# Altium PCB PCB1.PcbDoc
Units mm, origin at the board's own origin, x right, y up, seen from the top; angles counter-clockwise.
Board outline 190.25 x 150.01 mm, 2 copper layers (Top Layer, Bottom Layer); 72 components, 61 nets, 276 pads, 14 vias.
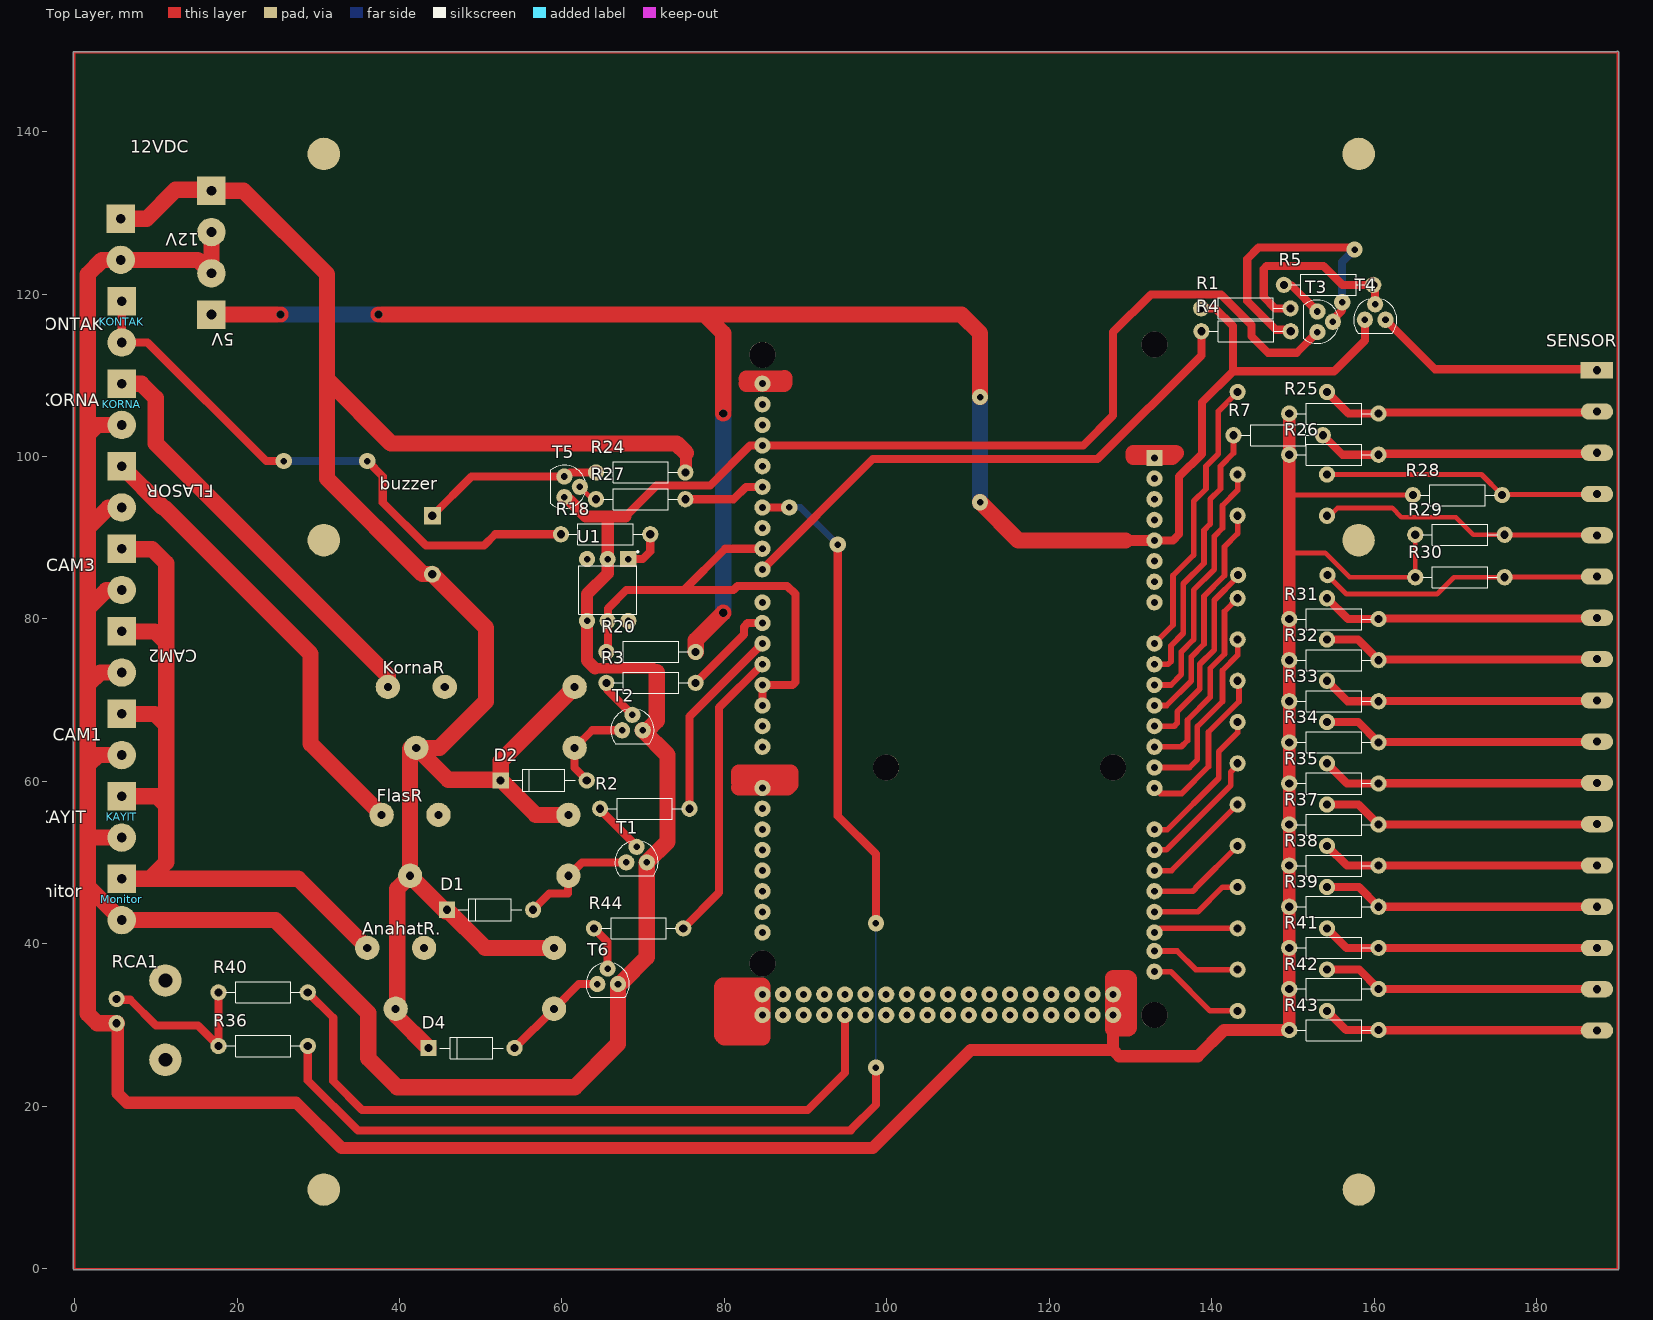
[diagram p0: Top Layer view]
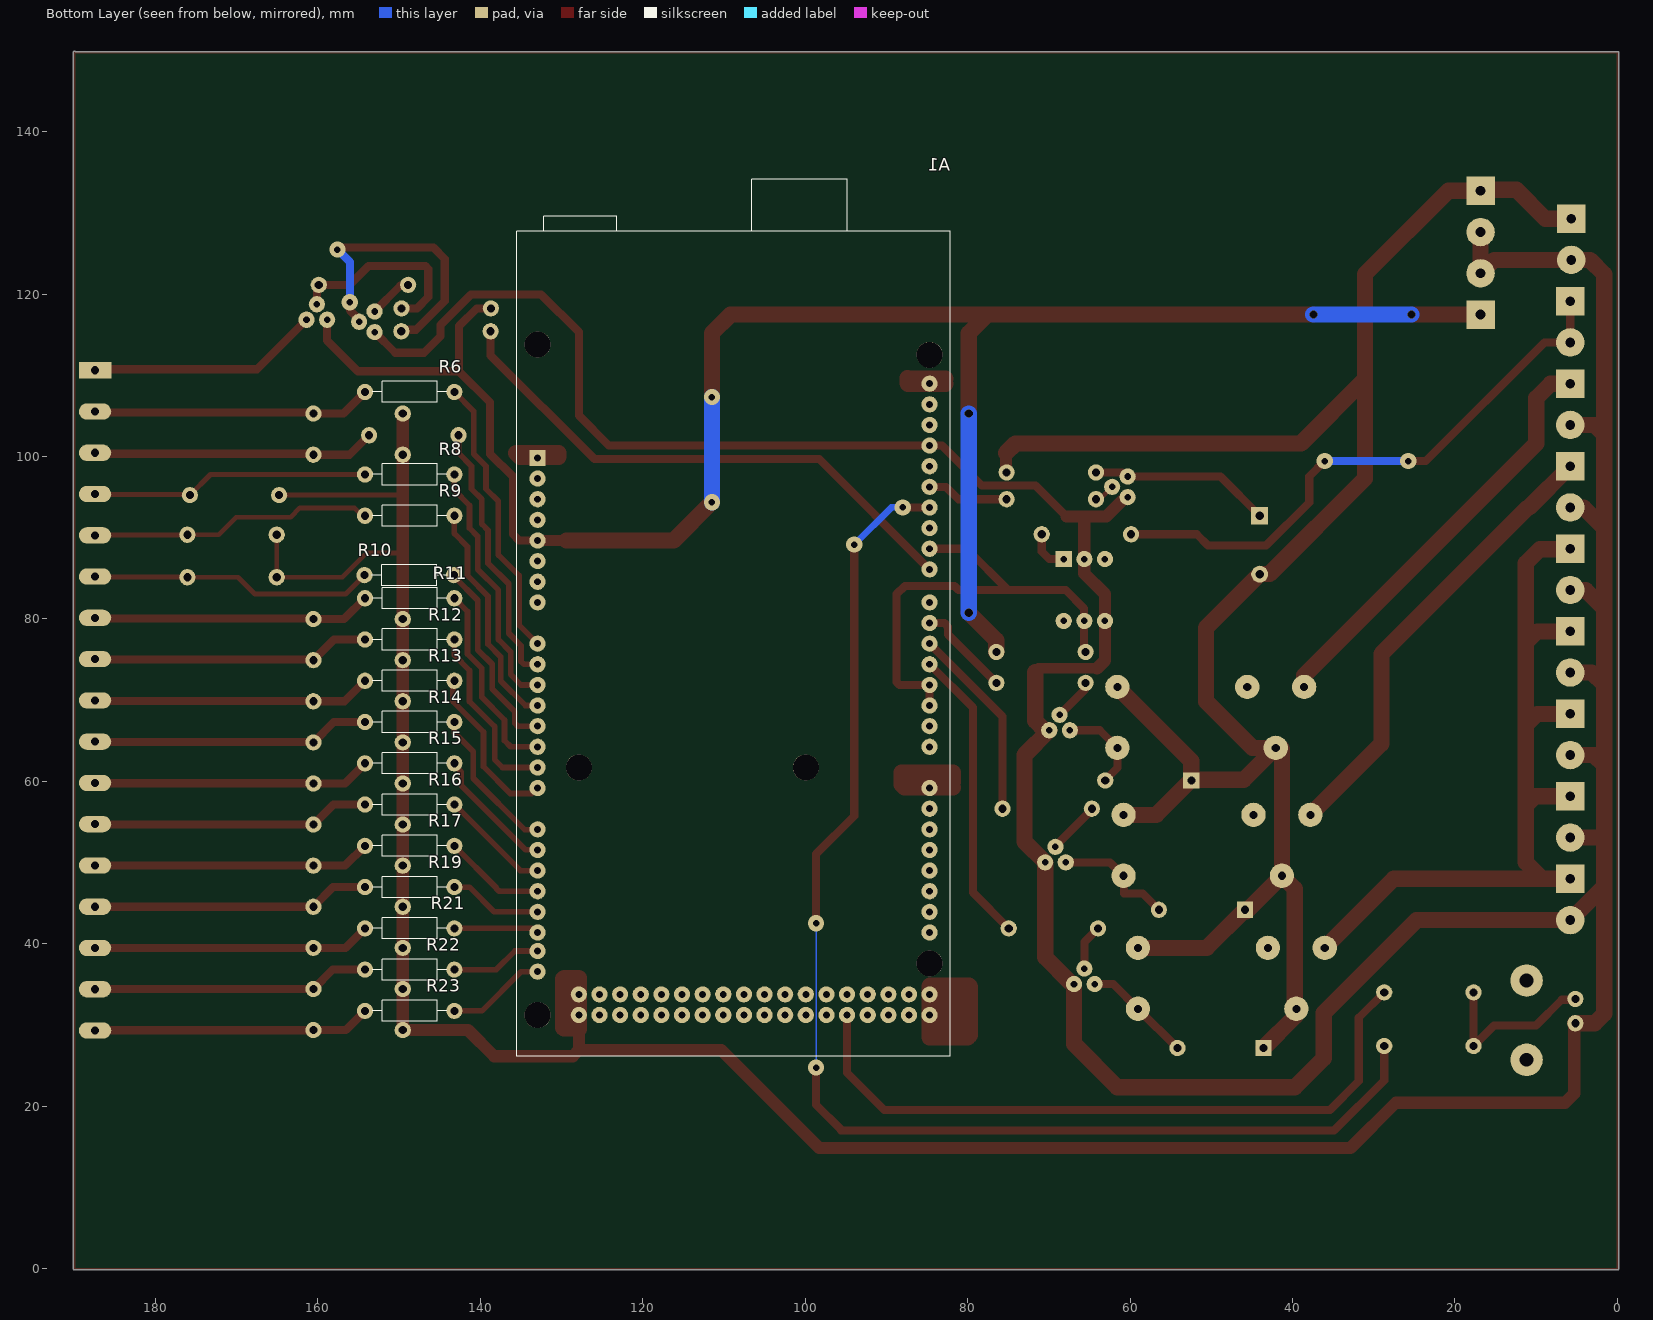
[diagram p1: Bottom Layer view, seen from below]

## Layer stack, top to bottom
Top Solder: solder mask 0.0102, Solder Resist, Dk 3.5
Top Layer: signal copper 0.0356
Dielectric 1: dielectric 0.32, FR-4, Dk 4.8
Bottom Layer: signal copper 0.0356
Bottom Solder: solder mask 0.0102, Solder Resist, Dk 3.5

## Board outline
-0.154,0 ccw(c-0.027,0) -0.027,-0.127 189.973,-0.127 ccw(c189.973,0) 190.1,0 ccw(c189.973,0) 190.092,0.044 190.092,149.758 ccw(c189.965,149.758) 189.882,149.855 ccw(c189.846,149.733) 189.846,149.86 -0.027,149.86 ccw(c-0.027,149.733) -0.154,149.733

## Design rules (kind name [scope] priority, off if disabled: settings)
Clearance [All] p1: gap=0.1 ignorepadtopadclearanceinfootprint=FALSE except(0: Arc-Hole Track-Hole SMDPad-Hole THPad-Hole Via-Hole Fill-Hole Poly-Hole Region-Hole Text-Hole)
HoleSize [All] p1: absolutevalues=TRUE maxlimit=15 minlimit=0.005 maxpercent=80.000 minpercent=20.000
PolygonConnect [All] p1: connectstyle=Relief reliefconductorwidth=0.254 reliefentries=4 polygonreliefangle="90 Angle" airgapwidth=0.254
RoutingVias [All] p1: holewidth=10 width=10 viastyle="Through Hole" minholewidth=0.1 minwidth=0.1 maxholewidth=10 maxwidth=10
SolderMaskExpansion [All] p1: expansion=0.102 istentingtop=FALSE
Width [All] p1 off: maxlimit=10 minlimit=0.1 preferedwidth=0.254 minimp=50.000000 maximp=50.000000 favimp=50.000000
29 further rules are at their usual default settings.

## Components (designator, comment, footprint, x,y, rotation, side; value= is the part's Value field where it differs from the comment)
5V "2x5,08" 2X5,08 16.854,120.01 r90 top
12V "2x5,08" 2X5,08 5.688,126.746 r270 top
12VDC "2x5,08" 2X5,08 16.854,130.17 r270 top
A1 "arduino mega" ARDUINO_A000067 108.812,76.962 r180 bottom
AnahatR. "Röle" RöLE 59.028,39.504 r180 top
buzzer "Buzzer" BUZZER 44.042,92.71 r270 top
CAM1 "2x5,08" 2X5,08 5.815,65.786 r270 top
CAM2 "2x5,08" 2X5,08 5.815,75.946 r270 top
CAM3 "2x5,08" 2X5,08 5.815,86.106 r270 top
D1 "1N4007" 1N4007 51.154,44.196 r0 top
D2 "1N4007" 1N4007 57.758,60.122 r0 top
D4 "1N4007" 1N4007 48.868,27.178 r0 top
FLASOR "2x5,08" 2X5,08 5.815,96.266 r270 top
FlasR "Röle" RöLE 60.804,55.88 r180 top
KAYIT "2x5,08" 2X5,08 5.815,55.626 r270 top
KONTAK "2x5,08" 2X5,08 5.815,116.586 r270 top
KORNA "2x5,08" 2X5,08 5.815,106.426 r270 top
KornaR "Röle" RöLE 61.568,71.628 r180 top
Monitor "2x5,08" 2X5,08 5.815,45.466 r270 top (schematic designator MONİTÖR)
R1 "10K" RES 144.194,118.237 r180 top
R2 "1K" RES 70.204,56.642 r180 top
R3 "1K" RES 70.966,72.136 r180 top
R4 "1k" RES 144.22,115.418 r0 top
R5 "1K" RES 154.38,121.133 r180 top
R6 "RES" RES 148.69,107.95 r0 bottom
R7 "RES" RES 148.182,102.616 r0 top
R8 "RES" RES 148.69,97.79 r0 bottom
R9 "RES" RES 148.69,92.71 r0 bottom
R10 "RES" RES 148.754,85.391 r0 bottom
R11 "RES" RES 148.69,82.55 r0 bottom
R12 "RES" RES 148.69,77.47 r0 bottom
R13 "RES" RES 148.69,72.39 r0 bottom
R14 "RES" RES 148.69,67.31 r0 bottom
R15 "RES" RES 148.69,62.23 r0 bottom
R16 "RES" RES 148.69,57.15 r0 bottom
R17 "RES" RES 148.69,52.07 r0 bottom
R18 "1k" RES 65.378,90.424 r0 top
R19 "RES" RES 148.69,46.99 r0 bottom
R20 "10k" RES 70.966,75.946 r0 top
R21 "RES" RES 148.69,41.91 r0 bottom
R22 "RES" RES 148.69,36.83 r0 bottom
R23 "RES" RES 148.69,31.75 r0 bottom
R24 "1k" RES 69.696,98.044 r0 top
R25 "1k" RES 155.04,105.283 r0 top
R26 "RES" RES 155.04,100.223 r0 top
R27 "1k" RES 69.696,94.742 r180 top
R28 "1k" RES 170.256,95.246 r0 top
R29 "1k" RES 170.561,90.37 r0 top
R30 "1k" RES 170.561,85.137 r0 top
R31 "RES" RES 155.04,79.985 r0 top
R32 "1k" RES 155.04,74.925 r0 top
R33 "1k" RES 155.04,69.865 r0 top
R34 "1k" RES 155.04,64.806 r0 top
R35 "1k" RES 155.04,59.746 r0 top
R36 "470" RES 23.214,27.432 r0 top
R37 "1k" RES 155.04,54.686 r0 top
R38 "1k" RES 155.04,49.627 r0 top
R39 "1k" RES 155.04,44.567 r0 top
R40 "1K" RES 23.214,34.036 r0 top
R41 "1k" RES 155.04,39.507 r0 top
R42 "1k" RES 155.04,34.447 r0 top
R43 "1k" RES 155.04,29.388 r0 top
R44 "1K" RES 69.442,41.91 r180 top
RCA1 "RCA YÜZEY" RCA 5.18,30.226 r270 top
SENSOR "17PİN" 17X5,08 187.425,110.617 r270 top
T1 "BC337" BC337-TO92 69.188,50.038 r0 top
T2 "BC337" BC337-TO92 68.68,66.294 r0 top
T3 "BC337" BC337-TO92 153.008,116.586 r270 top
T4 "BC327" BC337-TO92 160.12,116.84 r0 top
T5 "BC337" BC337-TO92 60.298,96.266 r270 top
T6 "BC337" BC337-TO92 65.632,35.052 r0 top
U1 "4N25" 4N25 65.632,83.566 r270 top

## Footprints (in the part's own frame and the unit in brackets; to place one, negate y for a bottom-side part, rotate by r counter-clockwise, add the part's x,y. Pads: shape width x height; smd on the part's side, far side on the other; paste and mask are expansions set on the pad)
1N4007 [mm]
  round 2 hole 1: A(5.3,0)
  rect 2x2 hole 1: C(-5.3,0)
  silkscreen extent -3.9,-1.35 3.9,1.35
2X5,08 [mm]
  rect 3.5x3.5 hole 1.2: 1(-2.54,0)
  round 3.5 hole 1.2: 2(2.54,0)
4N25 [mm]
  rect 2x2 hole 0.8: 1(-3.81,2.54)
  round 2 hole 0.8: 2(-3.81,0) 3(-3.81,-2.54) 4(3.81,-2.54) 5(3.81,0) 6(3.81,2.54)
  silkscreen extent -4.8,-3.56 3,3.8
17X5,08 [mm]
  rect 2x4 hole 1: 1(0,0)
  oval 2x4 hole 1: 2(5.08,0) 3(10.16,0) 4(15.24,0) 5(20.32,0) 6(25.4,0) 7(30.48,0) 8(35.56,0) 9(40.64,0) 10(45.72,0) 11(50.8,0) 12(55.88,0) 13(60.96,0) 14(66.04,0) 15(71.12,0) 16(76.2,0) 17(81.28,0)
ARDUINO_A000067 [mm]
  round 2 hole 0.85: 0(24.13,-12.7) 1(24.13,-10.16) 2(24.13,-7.62) 3(24.13,-5.08) 3V3(-24.13,15.24) 4(24.13,-2.54) 5(24.13,0) 5V_1(-24.13,12.7) 5V_2(24.13,-43.18) 5V_3(24.13,-45.72) 6(24.13,2.54) 7(24.13,5.08) 8(24.13,9.144) 9(24.13,11.684) 10(24.13,14.224) 11(24.13,16.764) 12(24.13,19.304) 13(24.13,21.844) 14(24.13,-17.78) 15(24.13,-20.32) 16(24.13,-22.86) 17(24.13,-25.4) 18(24.13,-27.94) 19(24.13,-30.48) 20(24.13,-33.02) 21(24.13,-35.56) 22(21.59,-43.18) 23(21.59,-45.72) 24(19.05,-43.18) 25(19.05,-45.72) 26(16.51,-43.18) 27(16.51,-45.72) 28(13.97,-43.18) 29(13.97,-45.72) 30(11.43,-43.18) 31(11.43,-45.72) 32(8.89,-43.18) 33(8.89,-45.72) 34(6.35,-43.18) 35(6.35,-45.72) 36(3.81,-43.18) 37(3.81,-45.72) 38(1.27,-43.18) 39(1.27,-45.72) 40(-1.27,-43.18) 41(-1.27,-45.72) 42(-3.81,-43.18) 43(-3.81,-45.72) 44(-6.35,-43.18) 45(-6.35,-45.72) 46(-8.89,-43.18) 47(-8.89,-45.72) 48(-11.43,-43.18) 49(-11.43,-45.72) 50(-13.97,-43.18) 51(-13.97,-45.72) 52(-16.51,-43.18) 53(-16.51,-45.72) AD0(-24.13,0) AD1(-24.13,-2.54) AD2(-24.13,-5.08) AD3(-24.13,-7.62) AD4(-24.13,-10.16) AD5(-24.13,-12.7) AD6(-24.13,-15.24) AD7(-24.13,-17.78) AD8(-24.13,-22.86) AD9(-24.13,-25.4) AD10(-24.13,-27.94) AD11(-24.13,-30.48) AD12(-24.13,-33.02) AD13(-24.13,-35.56) AD14(-24.13,-37.846) AD15(-24.13,-40.386) AREF(24.13,26.924) GND1(-24.13,10.16) GND2(-24.13,7.62) GND3(24.13,24.384) GND4(-19.05,-43.18) GND5(-19.05,-45.72) IOREF(-24.13,20.32) RESET(-24.13,17.78) SCL(24.13,32.004) SDA(24.13,29.464) VIN(-24.13,5.08)
  rect 2x2 hole 0.85: NC(-24.13,22.86)
  round 3.2 hole 3.2 unplated: ""(-24.13,-45.72) ""(-24.13,36.83) ""(-19.05,-15.24) ""(8.89,-15.24) ""(24.13,-39.37) ""(24.13,35.56)
  silkscreen extent -26.67,-50.8 26.67,57.15
BC337-TO92 [mm]
  round 2 hole 0.813: 1(1.27,0) 2(0,1.905) 3(-1.27,0)
  silkscreen extent -2.67,-1.65 2.66,2.55
BUZZER [mm]
  rect 2.1x2.1 hole 1: 1(0,0)
  round 2.1 hole 1: 2(7.2,0)
RCA [mm]
  round 2 hole 1: 1(0,0) 2(-3,0)
  round 4 hole 1.7: ""(-5.262,6) ""(4.5,6)
RES [mm]
  round 2 hole 1: 1(-5.5,0) 2(5.5,0)
  silkscreen extent -4.58,-1.3 4.58,1.3
RöLE [mm]
  round 3 hole 1: 1(16,0) 2(19.5,7.5) 3(23,0) 4(0,0) 5(0,7.5)

## Part data
5V 12V 12VDC buzzer CAM1 CAM2 CAM3 FLASOR KAYIT KONTAK KORNA Monitor: "TERMINAL BLOCK,HEADER, 5.08 MM, 2WAY; Product Range:-; Gender:Header", Package=None, Availability=Unavailable, EU_RoHS_Compliance=Compliant, MF="TE Connectivity", MP=282814-2, Price=None, SnapEDA_Link=https://www.snapeda.com/parts/282814-2/TE%20Connectivity%20AMP%20Connectors/view-part/2381383/?ref=snap, TE_purchase_URL=https://www.te.com/usa-en/product-282814-2.html?te_bu=Cor&te_type=disp&te_campaign=seda_glo_cor-seda-global-disp-prtnr-fy19-seda-model-bom-cta_sma-317_1&elqCampaignId=32493
A1: "ATmega2560 Arduino Mega2560 AVRÂ® ATmega AVR MCU 8-Bit Embedded Evaluation Board", Package=None, Availability=Unavailable, MF=Arduino, MP=A000067, Price=None, SnapEDA_Link=https://www.snapeda.com/parts/A000067/Arduino/view-part/557398/?ref=snap
D1 D2 D4: "Diode Standard 1000V 1A Through Hole DO-204AL _DO-41_", Package="DO-41 Good-Ark", Availability=Unavailable, MF="ON Semiconductor", MP=1N4007, Price=None, SnapEDA_Link=https://www.snapeda.com/parts/1N4007/ON%20Semiconductor/view-part/2816213/?ref=snap
R1 R2 R3 R4 R5 R18 R20 R24 R25 R27 R28 R29 R30 R32 R33 R34 R35 R36 R37 R38 R39 R40 R41 R42 R43 R44: library part RES, "1.4 kOhms Â±1% 0.25W, 1/4W Through Hole Resistor Axial Metal Film", Package="Axial Yageo", Availability=Unavailable, MF=Yageo, MP=MFR-25FBF52-1K, Price=None, SnapEDA_Link=https://www.snapeda.com/parts/MFR-25FBF52-1K/Yageo/view-part/1970177/?ref=snap
R6 R7 R8 R9 R10 R11 R12 R13 R14 R15 R16 R17 R19 R21 R22 R23 R26 R31: "1.4 kOhms Â±1% 0.25W, 1/4W Through Hole Resistor Axial Metal Film", Package="Axial Yageo", Availability=Unavailable, MF=Yageo, MP=MFR-25FBF52-1K, Price=None, SnapEDA_Link=https://www.snapeda.com/parts/MFR-25FBF52-1K/Yageo/view-part/1970177/?ref=snap
T1 T2 T3 T5 T6: "Bipolar _BJT_ Transistor NPN 45V 800mA 100MHz 625mW Through Hole TO-92-3", Package="TO-92 ON Semiconductor", Digi-Key_Part_Number=BC33740TACT-ND, Digi-Key_Purchase_URL=https://www.digikey.com/product-detail/en/on-semiconductor/BC33740TA/BC33740TACT-ND/1532788?utm_source=snapeda&utm_medium=aggregator&utm_campaign=symbol, MF="ON Semiconductor", MP=BC337, SnapEDA_Link=https://www.snapeda.com/parts/BC337/ON%20Semiconductor/view-part/2772334/?ref=snap
T4: library part BC337, "Bipolar _BJT_ Transistor NPN 45V 800mA 100MHz 625mW Through Hole TO-92-3", Package="TO-92 ON Semiconductor", Digi-Key_Part_Number=BC33740TACT-ND, Digi-Key_Purchase_URL=https://www.digikey.com/product-detail/en/on-semiconductor/BC33740TA/BC33740TACT-ND/1532788?utm_source=snapeda&utm_medium=aggregator&utm_campaign=symbol, MF="ON Semiconductor", MP=BC337, SnapEDA_Link=https://www.snapeda.com/parts/BC337/ON%20Semiconductor/view-part/2772334/?ref=snap
U1: "Optoisolator Transistor with Base Output 5000Vrms 1 Channel 6-DIP", Package="DIP-6 Lite-On", Availability=Unavailable, MF="Vishay Semiconductor", MP=4N25, Price=None, SnapEDA_Link=https://www.snapeda.com/parts/4N25/Vishay%20Semiconductor%20Opto%20Division/view-part/641454/?ref=snap

## Free pads (board coordinates)
  round 4 smd: 1(30.688,9.754) 1(30.688,89.704) 1(30.688,137.254) 1(158.079,89.704) 1(158.088,137.254) 1(158.113,9.754)

## Via types
v1: diameter 2, hole 0.8, Top Layer to Bottom Layer, 10 vias
v2: diameter 1, hole 1, Top Layer to Bottom Layer, 4 vias

## Nets (pads, with @x,y where several pads share a name; then routed paths per layer and width w, separated by ;. In a path a pad name is that pad's centre, name@x,y a point inside that pad or via, vN(x,y) a via of type N, cw(c..) or ccw(c..) an arc to the next point about the centre after c; other vN are vias at no path point)
+5: 5V.1 A1.5V_1 R1.2 R20.2 T4.3 | length 240.6
  Top Layer w1: A1.5V_1 135.228,89.662 135.99,90.424 135.99,97.531 138.784,100.325 138.784,106.68 142.594,110.49 ; R1.2 140.435,118.237 142.594,116.078 142.594,110.49 ; T4.3 158.85,114.3 155.04,110.49 142.594,110.49
  Top Layer w1.4: 129.386,89.662 A1.5V_1
  Top Layer w2: 5V.1 v2(25.368,117.47) ; v2(37.438,117.475) 77.57,117.475 ; R20.2 76.466,77.382 v2(79.856,80.772) ; v2(79.856,105.283) 79.856,115.189 77.57,117.475 ; v1(111.479,94.361) 116.178,89.662 129.386,89.662 ; v1(111.479,107.315) 111.479,115.189 109.193,117.475 77.57,117.475
  Bottom Layer w2: v2(25.368,117.47) 37.433,117.47 v2(37.438,117.475) ; v2(79.856,80.772) v2(79.856,105.283) ; v1(111.479,94.361) v1(111.479,107.315)
+12: 12V.1 12VDC.1 AnahatR..2 AnahatR..4 buzzer.2 D1.C D2.C D4.C FlasR.2 FlasR.4 KornaR.2 KornaR.4 R24.2 | length 251.7
  Top Layer w1.5: R24.2@75.284,98.044 75.284,100.428
  Top Layer w2: 12V.1 8.871,129.286 12.427,132.842 16.722,132.842 12VDC.1 20.806,132.71 31.088,122.428 31.088,109.474 ; KornaR.2@41.304,64.008 FlasR.2 ; D4.C 39.667,31.079 39.667,31.865 AnahatR..2 39.724,32.2 39.724,46.8 FlasR.2 ; D1.C@45.671,44.013 FlasR.2 ; D1.C 50.546,39.504 AnahatR..4 ; FlasR.4 56.776,55.88 D2.C@52.458,60.198 ; KornaR.4 52.458,62.518 D2.C@52.458,60.198 ; 75.284,100.428 74.112,101.6 38.962,101.6 31.088,109.474 ; 31.088,109.474 31.088,97.28 42.839,85.529 44.023,85.529 50.646,78.906 50.646,69.85 44.924,64.128 KornaR.2 45.998,60.198 D2.C@52.458,60.198
GND: 5V.2 12V.2 12VDC.2 A1.GND3 A1.GND5 CAM1.2 CAM2.2 CAM3.2 FLASOR.2 KAYIT.2 KORNA.2 Monitor.2 R25.1 R26.1 R28.1 R29.1 R30.1 R31.1 R32.1 R33.1 R34.1 R35.1 R37.1 R38.1 R39.1 R41.1 R42.1 R43.1 RCA1.1 T1.1 T2.1 T3.1 T5.1 T6.1 U1.2 U1.4 | length 700.5
  Top Layer w0.6: 149.54,88.134 153.975,88.134 156.972,85.137 R30.1 R29.1 ; 149.54,95.164 149.623,95.246 R28.1
  Top Layer w0.8: T6.1 67.043,35.052 67.303,35.312 T6.1@67.416,35.312 ; T2.1 70.05,66.394 T2.1@70.621,66.394 ; 71.22,73.914 71.689,73.445
  Top Layer w1: 67.821,92.613 71.652,96.444 78.256,96.444 83.158,101.346 A1.GND3 124.179,101.346 127.862,105.029 127.862,115.316 132.503,119.957 141.128,119.957 144.88,116.205 144.88,114.808 146.912,112.776 150.468,112.776 T3.1
  Top Layer w1.3: 64.069,73.914 71.22,73.914
  Top Layer w1.5: RCA1.1@5.307,30.226 5.307,21.59 6.45,20.447 27.278,20.447 32.866,14.859 98.271,14.859 110.336,26.924 127.862,26.924 ; T5.1@60.912,94.636 62.935,92.613 65.632,92.613 ; 64.069,73.914 63.092,74.891 U1.4 63.092,83.058 65.632,85.598 U1.2 65.632,92.613 ; 67.821,92.613 65.632,92.613 ; A1.GND5 127.862,26.924 ; R25.1@149.452,105.371 R25.1 R26.1 149.54,95.164 149.54,88.134 R31.1 R32.1 R33.1 R34.1 R35.1 R37.1 R38.1 R39.1 R41.1 R42.1 R43.1 141.502,29.388 138.276,26.162 128.624,26.162 127.862,26.924
  Top Layer w2: RCA1.1 2.796,30.226 1.624,31.398 1.624,47.117 ; KAYIT.2 1.975,53.086 1.624,52.735 ; CAM1.2 2.894,63.246 1.624,61.976 ; CAM2.2 3.148,73.406 1.624,71.882 ; CAM3.2 5.796,83.547 3.891,83.547 1.624,81.28 ; KORNA.2 2.796,103.886 1.624,102.714 ; FLASOR.2@5.834,93.745 FLASOR.2 5.796,93.707 4.145,93.707 1.624,91.186 ; 12VDC.2 5V.2 16.827,122.55 15.171,124.206 12V.2 5.669,124.187 3.383,124.187 1.624,122.428 1.624,102.714 ; T6.1 66.902,27.686 61.568,22.352 39.724,22.352 36.168,25.908 36.168,31.496 24.738,42.926 Monitor.2 1.624,47.117 ; T6.1@67.416,35.312 70.458,38.354 T1.1 72.998,52.578 72.998,63.246 T2.1 ; T2.1@70.621,66.394 71.689,67.461 71.689,73.445 ; 1.624,47.117 1.624,52.735 ; 1.624,52.735 1.624,61.976 ; 1.624,61.976 1.624,71.882 ; 1.624,71.882 1.624,81.28 ; 1.624,81.28 1.624,91.186 ; 1.624,91.186 1.624,102.714
NetA1_2: A1.2 A1.3 A1.9 R20.1 U1.5 | length 59.4
  Top Layer w1: R20.1@65.72,75.946 65.676,75.99 65.676,79.712 U1.5 65.662,79.786 65.662,81.31 67.918,83.566 75.03,83.566 ; A1.2 A1.3 88.395,71.882 88.746,72.233 88.746,83.058 87.73,84.074 81.634,84.074 81.126,83.566 75.03,83.566 ; A1.9 80.11,88.646 75.03,83.566
NetA1_4: A1.4 R44.1 | length 36.5
  Top Layer w1: R44.1 79.348,46.316 79.348,69.088 A1.4
NetA1_5: A1.5 R2.1 | length 24
  Top Layer w1: R2.1 75.704,67.984 A1.5
NetA1_6: A1.6 R3.1 | length 11.8
  Top Layer w1: R3.1 82.396,78.066 82.396,79.033 82.865,79.502 A1.6
NetA1_8: A1.8 R4.1 | length 67.9
  Top Layer w1: A1.8 98.271,99.695 125.957,99.695 138.72,112.458 R4.1
NetA1_11: A1.11 R36.2 | length 160.2
  Top Layer w1: R36.2 28.714,23.202 34.898,17.018 95.604,17.018 95.604,17.145 98.652,20.193 v1(98.652,24.765) ; A1.11 v1(87.984,93.726) ; v1(93.953,89.154) 93.953,55.753 98.652,51.054 v1(98.652,42.545)
  Bottom Layer w0.2: v1(98.652,24.765) v1(98.652,42.545)
  Bottom Layer w0.8: v1(87.984,93.726) 89.381,93.726 v1(93.953,89.154)
NetA1_12: A1.12 R27.1 | length 10.3
  Top Layer w1: R27.1 81.126,94.742 82.65,96.266 A1.12 A1.12@84.537,96.121
NetA1_29: A1.29 R40.2 | length 85.7
  Top Layer w1: R40.2 31.85,30.9 31.85,23.114 35.406,19.558 90.27,19.558 94.842,24.13 A1.29
NetA1_AD0: A1.AD0 R6.1 | length 35.2
  Top Layer w0.7: A1.AD0 135.228,79.248 135.228,85.344 137.768,87.884 137.768,94.488 139.292,96.012 139.292,98.806 140.816,100.33 140.816,105.576 R6.1
NetA1_AD1: A1.AD1 R7.1 | length 33.2
  Top Layer w0.7: A1.AD1 134.623,74.422 134.974,74.773 134.974,76.708 136.498,78.232 136.498,84.328 139.038,86.868 139.038,90.932 139.8,91.694 139.8,94.742 141.07,96.012 141.07,98.806 142.682,100.418 R7.1
NetA1_AD2: A1.AD2 R8.1 | length 31.3
  Top Layer w0.7: A1.AD2 134.974,71.882 136.244,73.152 136.244,75.946 137.768,77.47 137.768,83.566 140.308,86.106 140.308,90.17 141.324,91.186 141.324,93.98 143.19,95.846 R8.1
NetA1_AD3: A1.AD3 R9.1 | length 28.5
  Top Layer w0.7: A1.AD3 134.446,69.342 137.49,72.386 137.49,75.358 139.038,76.906 139.038,82.804 141.578,85.344 141.578,88.9 143.19,90.512 R9.1
NetA1_AD4: A1.AD4 R10.1 | length 24.1
  Top Layer w0.7: A1.AD4 135.385,66.802 135.736,67.153 135.736,68.58 138.53,71.374 138.53,74.422 140.308,76.2 140.308,82.296 R10.1@143.19,85.178
NetA1_AD5: A1.AD5 R11.1 | length 24.5
  Top Layer w0.7: A1.AD5 136.244,64.262 137.006,65.024 137.006,67.564 139.8,70.358 139.8,73.914 141.578,75.692 141.578,80.938 R11.1
NetA1_AD6: A1.AD6 R12.1 | length 22.5
  Top Layer w0.7: A1.AD6 137.26,61.722 138.227,62.689 138.227,66.753 141.324,69.85 141.324,73.66 143.19,75.526 R12.1
NetA1_AD7: A1.AD7 R13.1 | length 20.5
  Top Layer w0.7: A1.AD7@132.95,59.174 133.02,59.174 133.672,58.522 136.3,58.522 139.598,61.82 139.598,66.092 143.356,69.85 143.356,71.8 143.305,71.851 143.305,72.275 R13.1
NetA1_AD8: A1.AD8 R14.1 | length 18.5
  Top Layer w0.7: A1.AD8 133.008,54.036 134.507,54.036 140.868,60.397 140.868,63.664 143.19,65.986 R14.1
NetA1_AD9: A1.AD9 R15.1 | length 15.8
  Top Layer w0.7: A1.AD9 132.965,51.585 134.418,51.585 142.342,59.509 142.342,61.17 143.19,62.018 R15.1
NetA1_AD10: A1.AD10 R16.1 | length 13.6
  Top Layer w0.7: A1.AD10 135.062,49.022 R16.1
NetA1_AD11: A1.AD11 R17.1 | length 12.6
  Top Layer w0.7: A1.AD11 137.671,46.482 138.022,46.833 138.022,46.902 R17.1
NetA1_AD12: A1.AD12 R19.1 | length 11.5
  Top Layer w0.7: A1.AD12 138.276,43.942 141.324,46.99 R19.1
NetA1_AD13: A1.AD13 R21.1 | length 10.5
  Top Layer w0.7: A1.AD13 133.147,41.402 133.655,41.91 R21.1
NetA1_AD14: A1.AD14 R22.1 | length 11.2
  Top Layer w0.7: A1.AD14 135.736,39.116 138.022,36.83 R22.1
NetA1_AD15: A1.AD15 R23.1 | length 12.2
  Top Layer w0.7: A1.AD15 134.974,36.576 139.8,31.75 R23.1
NetAnahatR._3: AnahatR..3 CAM1.1 CAM2.1 CAM3.1 KAYIT.1 Monitor.1 | length 97.7
  Top Layer w2: Monitor.1 9.244,48.006 ; KAYIT.1 10.104,58.166 11.276,56.994 ; CAM1.1 5.83,68.311 9.865,68.311 11.276,66.9 ; CAM2.1 5.83,78.471 9.865,78.471 11.276,77.06 ; CAM3.1 5.865,88.596 9.548,88.596 11.276,86.868 11.276,77.06 ; AnahatR..3 27.526,48.006 9.244,48.006 ; 9.244,48.006 11.276,50.038 11.276,56.994 ; 11.276,56.994 11.276,66.9 ; 11.276,66.9 11.276,77.06
NetAnahatR._5: AnahatR..5 D4.A T6.3 | length 13.5
  Top Layer w1: D4.A 54.185,27.178 59.011,32.004 AnahatR..5 62.076,35.052 T6.3
Netbuzzer_1: buzzer.1 R24.1 T5.3 | length 22.4
  Top Layer w1: buzzer.1 48.868,97.536 T5.3 60.493,97.536 61.001,98.044 R24.1
NetD1_A: D1.A FlasR.5 T1.3 | length 15.1
  Top Layer w1: D1.A 58.446,46.188 60.732,46.188 60.732,48.308 FlasR.5 62.462,50.038 T1.3
NetD2_A: D2.A KornaR.5 T2.3 | length 11.3
  Top Layer w1: D2.A@63.058,60.198 61.568,61.688 KornaR.5 63.734,66.294 T2.3
NetFLASOR_1: FLASOR.1 FlasR.3 | length 56.3
  Top Layer w2: FLASOR.1 10.895,93.726 11.022,93.726 29.056,75.692 29.056,64.628 FlasR.3
NetKONTAK_1: KONTAK.1 KONTAK.2 R18.1 | length 72
  Top Layer w1: KONTAK.1 KONTAK.2 8.99,114.046 23.595,99.441 v1(25.754,99.441) ; v1(36.041,99.441) 37.946,97.536 37.946,94.334 43.253,89.027 50.392,89.027 51.789,90.424 R18.1
  Bottom Layer w1: v1(25.754,99.441) v1(36.041,99.441)
NetKORNA_1: KORNA.1 KornaR.3 | length 52.3
  Top Layer w2: KORNA.1 8.228,108.966 10.006,107.188 10.006,101.6 38.568,73.038 KornaR.3
NetR1_1: R1.1 R5.1 T4.2 | length 24.4
  Top Layer w1: R1.1 147.801,118.237 146.404,119.634 146.404,123.093 146.755,123.444 153.77,123.444 156.081,121.133 R5.1 159.88,120.97 160.12,120.73 T4.2
NetR2_2: R2.2 T1.2 | length 6.6
  Top Layer w0.8: R2.2@64.704,56.534 R2.2 ; T1.2 T1.2@69.188,52.051
  Top Layer w1: R2.2@64.704,56.534 T1.2@69.188,52.051
NetR3_2: R3.2 T2.2 | length 5.3
  Top Layer w0.8: R3.2 65.543,72.059 R3.2@65.543,71.336
  Top Layer w1: R3.2@65.543,71.336 T2.2
NetR4_2: R4.2 T3.2 | length 36
  Top Layer w1: R4.2 149.528,115.609 147.889,115.609 144.372,119.126 144.372,124.333 145.769,125.73 157.326,125.73 v1(157.58,125.476) ; T3.2 154.913,116.857 156.056,118 v1(156.056,118.999)
  Bottom Layer w1: v1(156.056,118.999) 156.056,123.952 v1(157.58,125.476)
NetR5_2: R5.2 T3.3 | length 5.5
  Top Layer w0.6: R5.2 148.994,121.018 R5.2@149.846,121.018
  Top Layer w1: R5.2@149.846,121.018 T3.3
NetR6_2: R6.2 R25.2 SENSOR.2 | length 34.4
  Top Layer w1: R6.2 156.857,105.283 R25.2 160.655,105.398 SENSOR.2@187.425,105.398
NetR7_2: R7.2 R26.2 SENSOR.3 | length 34.9
  Top Layer w1: R7.2 156.075,100.223 R26.2 160.655,100.338 187.306,100.338 SENSOR.3@187.474,100.506
NetR8_2: R8.2 R28.2 SENSOR.4 | length 34.3
  Top Layer w0.6: R8.2 173.213,97.79 R28.2 175.821,95.312 187.36,95.312 SENSOR.4
NetR9_2: R9.2 R29.2 SENSOR.5 | length 35
  Top Layer w0.6: R9.2 154.537,92.71 155.499,93.672 162.204,93.672 163.347,92.529 170.053,92.529 172.212,90.37 R29.2 176.097,90.333 187.389,90.333 SENSOR.5
NetR10_2: R10.2 R30.2 SENSOR.6 | length 35
  Top Layer w0.6: R10.2 156.591,83.054 167.737,83.054 169.82,85.137 R30.2 176.101,85.177 187.385,85.177 SENSOR.6
NetR11_2: R11.2 R31.2 SENSOR.7 | length 34.3
  Top Layer w1: R11.2 156.755,79.985 R31.2 160.616,80.061 SENSOR.7@187.425,80.061
NetR12_2: R12.2 R32.2 SENSOR.8 | length 34.3
  Top Layer w1: R12.2 157.995,77.47 R32.2 160.606,74.991 SENSOR.8@187.425,74.991
NetR13_2: R13.2 R33.2 SENSOR.9 | length 34.3
  Top Layer w1: R13.2 156.715,69.865 R33.2 160.596,69.921 SENSOR.9@187.425,69.921
NetR14_2: R14.2 R34.2 SENSOR.10 | length 34.2
  Top Layer w1: R14.2 158.036,67.31 R34.2 160.586,64.851 SENSOR.10@187.298,64.851
NetR15_2: R15.2 R35.2 SENSOR.11 | length 34.3
  Top Layer w1: R15.2 156.674,59.746 R35.2 160.576,59.781 SENSOR.11@187.425,59.781
NetR16_2: R16.2 R37.2 SENSOR.12 | length 34.3
  Top Layer w1: R16.2 158.076,57.15 R37.2 160.565,54.712 SENSOR.12@187.425,54.712
NetR17_2: R17.2 R38.2 SENSOR.13 | length 34.3
  Top Layer w1: R17.2 156.633,49.627 R38.2 160.555,49.642 SENSOR.13@187.425,49.642
NetR18_2: R18.2 U1.1 | length 5.2
  Top Layer w1: U1.1 69.95,87.376 70.878,88.304 R18.2
NetR19_2: R19.2 R39.2 SENSOR.14 | length 34.2
  Top Layer w1: R19.2 158.117,46.99 R39.2 160.545,44.572 SENSOR.14@187.425,44.572
NetR21_2: R21.2 R41.2 SENSOR.15 | length 34.2
  Top Layer w1: R21.2 156.593,39.507 R41.2 160.545,39.502 SENSOR.15@187.425,39.502
NetR22_2: R22.2 R42.2 SENSOR.16 | length 34.6
  Top Layer w1: R22.2 158.157,36.83 R42.2 160.555,34.432 SENSOR.16@187.806,34.432
NetR23_2: R23.2 R43.2 SENSOR.17 | length 34.5
  Top Layer w1: R23.2 156.552,29.388 R43.2 160.565,29.362 SENSOR.17@187.679,29.362
NetR27_2: R27.2 T5.2 | length 2.6
  Top Layer w0.6: T5.2 63.612,94.857 64.081,94.857 R27.2
NetR36_1: R36.1 R40.1 RCA1.2 | length 21.5
  Top Layer w1: RCA1.2 5.28,33.126 6.852,33.126 10.006,29.972 15.174,29.972 R36.1 R40.1
NetR44_2: R44.2 T6.2 | length 5.7
  Top Layer w1: R44.2 65.632,40.22 T6.2
NetSENSOR_1: SENSOR.1 T4.1 | length 28.6
  Top Layer w1: T4.1 167.486,110.744 SENSOR.1@187.425,110.744
pads on no net: A1. A1.0 A1.1 A1.3V3 A1.5V_2 A1.5V_3 A1.7 A1.10 A1.13 A1.14 A1.15 A1.16 A1.17 A1.18 A1.19 A1.20 A1.21 A1.22 A1.23 A1.24 A1.25 A1.26 A1.27 A1.28 A1.30 A1.31 A1.32 A1.33 A1.34 A1.35 A1.36 A1.37 A1.38 A1.39 A1.40 A1.41 A1.42 A1.43 A1.44 A1.45 A1.46 A1.47 A1.48 A1.49 A1.50 A1.51 A1.52 A1.53 A1.AREF A1.GND1 A1.GND2 A1.GND4 A1.IOREF A1.NC A1.RESET A1.SCL A1.SDA A1.VIN AnahatR..1 FlasR.1 KornaR.1 RCA1. U1.3 U1.6
copper on no net: | length 769
  Top Layer w0.254: 189.846,149.733 -0.027,149.733 -0.027,0 189.965,0 ; 189.965,149.758 189.965,0 ; 189.973,0 189.965,0
  Top Layer w2: 81.788,59.255 87.757,59.255 88.138,59.636 88.138,61.058 88.113,61.083 81.788,61.083 81.788,59.94 ; 82.728,108.962 87.351,108.962 87.401,109.013 87.401,109.674 87.3,109.572 82.728,109.572 ; 83.566,30.349 83.566,33.27 ; 83.617,33.728 84.684,34.794 84.684,28.495 79.985,28.495 79.705,28.775 79.705,34.718 79.832,34.845 84.633,34.845 ; 129.769,29.689 129.692,29.613 127.965,29.613 127.864,29.511 127.864,35.81 129.642,35.81 129.769,35.683 ; 130.353,99.971 135.103,99.971 135.56,100.428 130.353,100.428
  Top Layer w2.1: 129.769,29.689 129.769,35.683
  Top Layer w3: 81.582,33.474 80.325,32.217 80.325,31.269 82.517,29.077 83.336,29.896 ; 82.082,33.88 82.082,31.529 82.931,30.68

## Silkscreen, mask and mechanical layers (free items; w line width, h text height)
Mechanical 1:
  lines w0.254: 78.078,148.59 78.078,102.003 77.929,101.854 13.054,101.854 13.054,148.59 78.176,148.59

## Text inside footprints (layer, text, board x,y; h text height)
T1: Mechanical 13 "2" at 68.552,50.674 h1.27; Mechanical 13 "3" at 67.028,50.038 h1.27; Mechanical 13 "1" at 70.333,50.038 h1.27
T2: Mechanical 13 "2" at 68.044,66.93 h1.27; Mechanical 13 "3" at 66.52,66.294 h1.27; Mechanical 13 "1" at 69.825,66.294 h1.27
T3: Mechanical 13 "2" at 153.644,117.222 h1.27 r270; Mechanical 13 "3" at 153.008,118.746 h1.27 r270; Mechanical 13 "1" at 153.008,115.441 h1.27 r270
T4: Mechanical 13 "2" at 159.484,117.476 h1.27; Mechanical 13 "3" at 157.96,116.84 h1.27; Mechanical 13 "1" at 161.265,116.84 h1.27
T5: Mechanical 13 "2" at 60.934,96.902 h1.27 r270; Mechanical 13 "3" at 60.298,98.426 h1.27 r270; Mechanical 13 "1" at 60.298,95.121 h1.27 r270
T6: Mechanical 13 "2" at 64.996,35.688 h1.27; Mechanical 13 "3" at 63.472,35.052 h1.27; Mechanical 13 "1" at 66.777,35.052 h1.27